# EAGLE board panel (EAGLE 8.2.2)
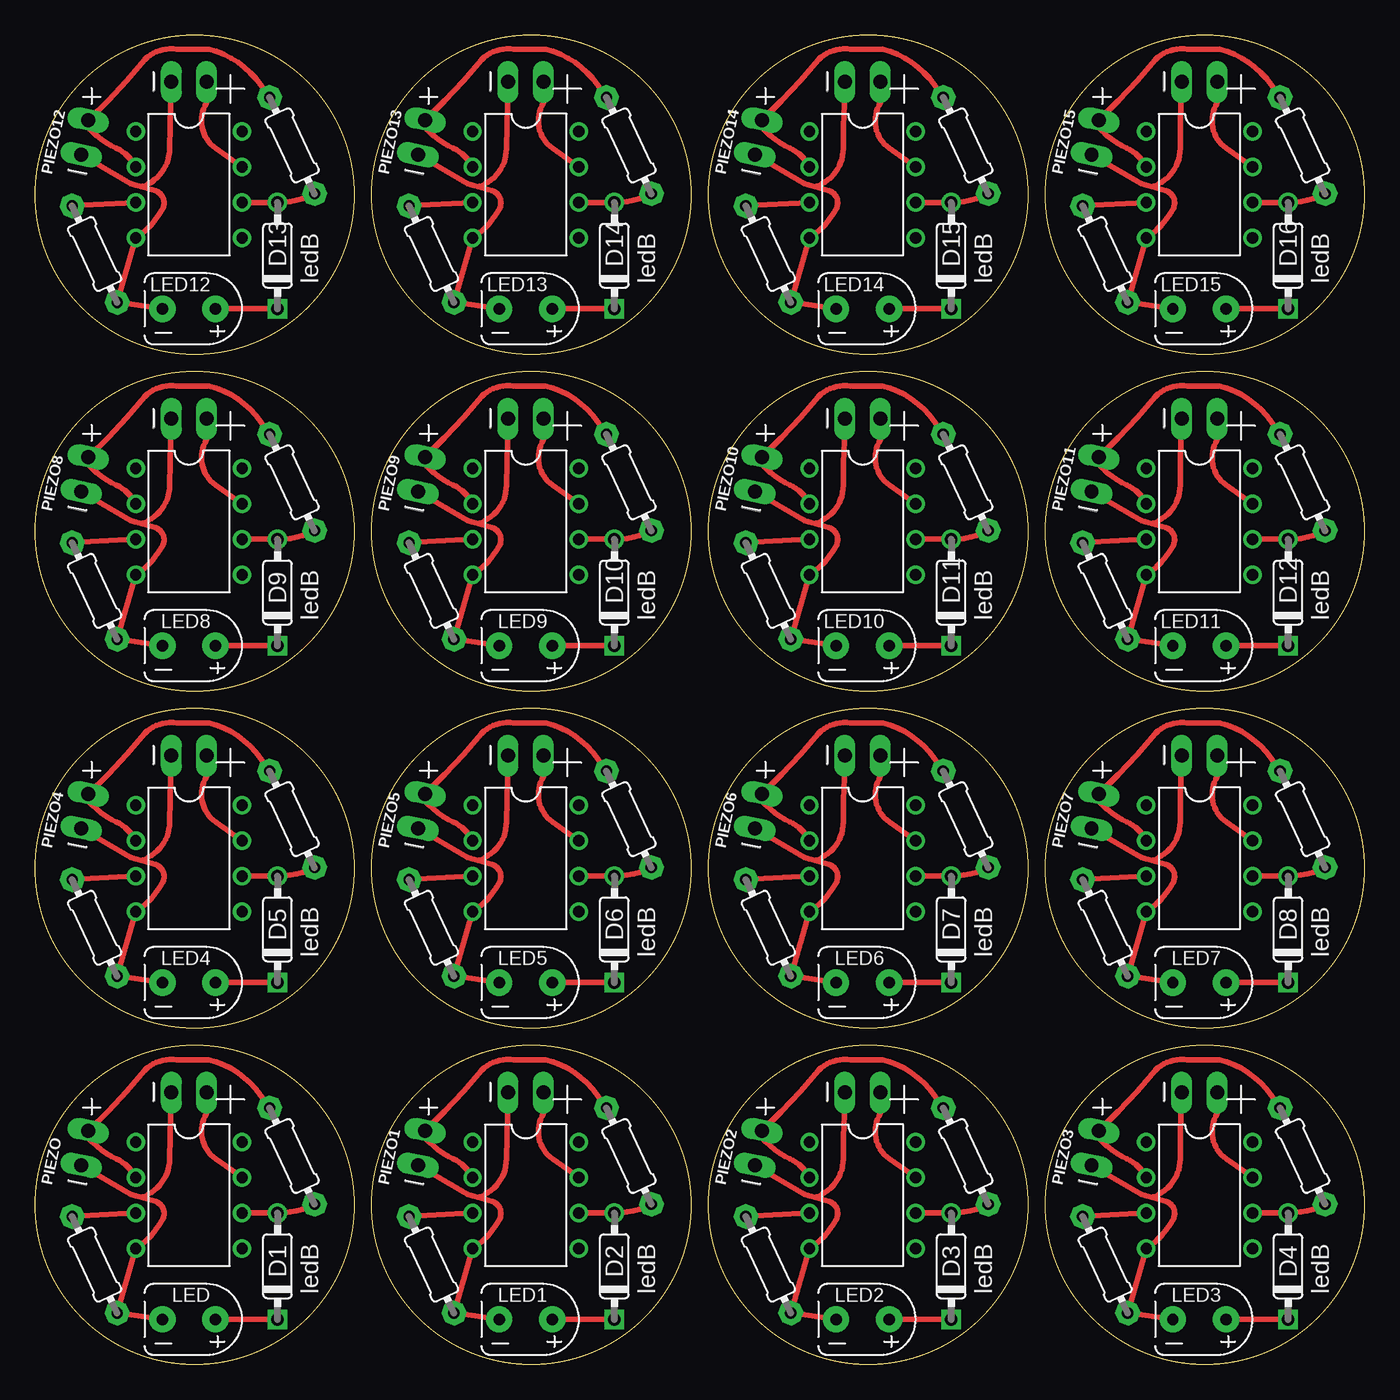
[diagram p0: board, top side]

Size 95.25 x 95.25 mm. Coordinates in mm from the lower left corner, seen from the top.
Outline: circle at 11.43,11.43 radius 11.43
Outline: circle at 35.56,11.43 radius 11.43
Outline: circle at 59.69,11.43 radius 11.43
Outline: circle at 83.82,11.43 radius 11.43
Outline: circle at 11.43,35.56 radius 11.43
Outline: circle at 35.56,35.56 radius 11.43
Outline: circle at 59.69,35.56 radius 11.43
Outline: circle at 83.82,35.56 radius 11.43
Outline: circle at 11.43,59.69 radius 11.43
Outline: circle at 35.56,59.69 radius 11.43
Outline: circle at 59.69,59.69 radius 11.43
Outline: circle at 83.82,59.69 radius 11.43
Outline: circle at 11.43,83.82 radius 11.43
Outline: circle at 35.56,83.82 radius 11.43
Outline: circle at 59.69,83.82 radius 11.43
Outline: circle at 83.82,83.82 radius 11.43
Copper layers (1*16): Top 0.035mm / dielectric 1.5mm / Bottom 0.035mm
Design rules "default": minimum track width 6mil, minimum drill 0.35mm, track to track 6mil, track to pad 6mil, pad to pad 6mil, via to via 6mil, smd to smd 6mil, copper to edge 40mil, drill to drill 6mil, minimum pad ring 10mil, minimum via ring 8mil, stop-mask expansion 4mil, vias tented up to drill 0mil, thermal gap 10mil

## Footprints (pad centres in the part's own frame; a part is rotated, then mirrored left to right if it is on the bottom)
DO35-3 = drill 0.9: A 3.81,0 | drill 0.9 square: C -3.81,0
1X02_OVAL = drill 1 long: 1 -1.27,0; 2 1.27,0
LED5MM = drill 0.813 pad 1.88: A -1.905,0; K 1.905,0
DIL08 = drill 0.813 pad 1.27: 1 -3.81,-3.81; 2 -1.27,-3.81; 3 1.27,-3.81; 4 3.81,-3.81; 5 3.81,3.81; 6 1.27,3.81; 7 -1.27,3.81; 8 -3.81,3.81
1X02_PEIZO = drill 1 long: 1 -1.27,0; 2 1.27,0
0204/7 = drill 0.813 pad 1.676 octagon: 1 -3.81,0; 2 3.81,0

## Placement (x,y rotation side)
D1  diode  [DO35-3]  17.38,7.05 90 top
D2  diode  [DO35-3]  41.51,7.05 90 top
D3  diode  [DO35-3]  65.64,7.05 90 top
D4  diode  [DO35-3]  89.77,7.05 90 top
D5  diode  [DO35-3]  17.38,31.18 90 top
D6  diode  [DO35-3]  41.51,31.18 90 top
D7  diode  [DO35-3]  65.64,31.18 90 top
D8  diode  [DO35-3]  89.77,31.18 90 top
D9  diode  [DO35-3]  17.38,55.31 90 top
D10  diode  [DO35-3]  41.51,55.31 90 top
D11  diode  [DO35-3]  65.64,55.31 90 top
D12  diode  [DO35-3]  89.77,55.31 90 top
D13  diode  [DO35-3]  17.38,79.44 90 top
D14  diode  [DO35-3]  41.51,79.44 90 top
D15  diode  [DO35-3]  65.64,79.44 90 top
D16  diode  [DO35-3]  89.77,79.44 90 top
JP1  6V+  [1X02_OVAL]  11.03,19.49 0 top
JP2  6V+  [1X02_OVAL]  35.16,19.49 0 top
JP3  6V+  [1X02_OVAL]  59.29,19.49 0 top
JP4  6V+  [1X02_OVAL]  83.42,19.49 0 top
JP5  6V+  [1X02_OVAL]  11.03,43.62 0 top
JP6  6V+  [1X02_OVAL]  35.16,43.62 0 top
JP7  6V+  [1X02_OVAL]  59.29,43.62 0 top
JP8  6V+  [1X02_OVAL]  83.42,43.62 0 top
JP9  6V+  [1X02_OVAL]  11.03,67.75 0 top
JP10  6V+  [1X02_OVAL]  35.16,67.75 0 top
JP11  6V+  [1X02_OVAL]  59.29,67.75 0 top
JP12  6V+  [1X02_OVAL]  83.42,67.75 0 top
JP13  6V+  [1X02_OVAL]  11.03,91.88 0 top
JP14  6V+  [1X02_OVAL]  35.16,91.88 0 top
JP15  6V+  [1X02_OVAL]  59.29,91.88 0 top
JP16  6V+  [1X02_OVAL]  83.42,91.88 0 top
LED  [LED5MM]  11.03,3.24 180 top
LED1  [LED5MM]  35.16,3.24 180 top
LED2  [LED5MM]  59.29,3.24 180 top
LED3  [LED5MM]  83.42,3.24 180 top
LED4  [LED5MM]  11.03,27.37 180 top
LED5  [LED5MM]  35.16,27.37 180 top
LED6  [LED5MM]  59.29,27.37 180 top
LED7  [LED5MM]  83.42,27.37 180 top
LED8  [LED5MM]  11.03,51.5 180 top
LED9  [LED5MM]  35.16,51.5 180 top
LED10  [LED5MM]  59.29,51.5 180 top
LED11  [LED5MM]  83.42,51.5 180 top
LED12  [LED5MM]  11.03,75.63 180 top
LED13  [LED5MM]  35.16,75.63 180 top
LED14  [LED5MM]  59.29,75.63 180 top
LED15  [LED5MM]  83.42,75.63 180 top
OPAMP  LM741  [DIL08]  11.03,12.13 270 top
OPAMP1  LM741  [DIL08]  35.16,12.13 270 top
OPAMP2  LM741  [DIL08]  59.29,12.13 270 top
OPAMP3  LM741  [DIL08]  83.42,12.13 270 top
OPAMP4  LM741  [DIL08]  11.03,36.26 270 top
OPAMP5  LM741  [DIL08]  35.16,36.26 270 top
OPAMP6  LM741  [DIL08]  59.29,36.26 270 top
OPAMP7  LM741  [DIL08]  83.42,36.26 270 top
OPAMP8  LM741  [DIL08]  11.03,60.39 270 top
OPAMP9  LM741  [DIL08]  35.16,60.39 270 top
OPAMP10  LM741  [DIL08]  59.29,60.39 270 top
OPAMP11  LM741  [DIL08]  83.42,60.39 270 top
OPAMP12  LM741  [DIL08]  11.03,84.52 270 top
OPAMP13  LM741  [DIL08]  35.16,84.52 270 top
OPAMP14  LM741  [DIL08]  59.29,84.52 270 top
OPAMP15  LM741  [DIL08]  83.42,84.52 270 top
PIEZO  PIEZO  [1X02_PEIZO]  3.57,15.51 78 top
PIEZO1  PIEZO  [1X02_PEIZO]  27.7,15.51 78 top
PIEZO2  PIEZO  [1X02_PEIZO]  51.83,15.51 78 top
PIEZO3  PIEZO  [1X02_PEIZO]  75.96,15.51 78 top
PIEZO4  PIEZO  [1X02_PEIZO]  3.57,39.64 78 top
PIEZO5  PIEZO  [1X02_PEIZO]  27.7,39.64 78 top
PIEZO6  PIEZO  [1X02_PEIZO]  51.83,39.64 78 top
PIEZO7  PIEZO  [1X02_PEIZO]  75.96,39.64 78 top
PIEZO8  PIEZO  [1X02_PEIZO]  3.57,63.77 78 top
PIEZO9  PIEZO  [1X02_PEIZO]  27.7,63.77 78 top
PIEZO10  PIEZO  [1X02_PEIZO]  51.83,63.77 78 top
PIEZO11  PIEZO  [1X02_PEIZO]  75.96,63.77 78 top
PIEZO12  PIEZO  [1X02_PEIZO]  3.57,87.9 78 top
PIEZO13  PIEZO  [1X02_PEIZO]  27.7,87.9 78 top
PIEZO14  PIEZO  [1X02_PEIZO]  51.83,87.9 78 top
PIEZO15  PIEZO  [1X02_PEIZO]  75.96,87.9 78 top
R1  10K  [0204/7]  4.28,7.16 115 top
R2  10M  [0204/7]  18.42,14.93 115 top
R3  10K  [0204/7]  28.41,7.16 115 top
R4  10M  [0204/7]  42.55,14.93 115 top
R5  10K  [0204/7]  52.54,7.16 115 top
R6  10M  [0204/7]  66.68,14.93 115 top
R7  10K  [0204/7]  76.67,7.16 115 top
R8  10M  [0204/7]  90.81,14.93 115 top
R9  10K  [0204/7]  4.28,31.29 115 top
R10  10M  [0204/7]  18.42,39.06 115 top
R11  10K  [0204/7]  28.41,31.29 115 top
R12  10M  [0204/7]  42.55,39.06 115 top
R13  10K  [0204/7]  52.54,31.29 115 top
R14  10M  [0204/7]  66.68,39.06 115 top
R15  10K  [0204/7]  76.67,31.29 115 top
R16  10M  [0204/7]  90.81,39.06 115 top
R17  10K  [0204/7]  4.28,55.42 115 top
R18  10M  [0204/7]  18.42,63.19 115 top
R19  10K  [0204/7]  28.41,55.42 115 top
R20  10M  [0204/7]  42.55,63.19 115 top
R21  10K  [0204/7]  52.54,55.42 115 top
R22  10M  [0204/7]  66.68,63.19 115 top
R23  10K  [0204/7]  76.67,55.42 115 top
R24  10M  [0204/7]  90.81,63.19 115 top
R25  10K  [0204/7]  4.28,79.55 115 top
R26  10M  [0204/7]  18.42,87.32 115 top
R27  10K  [0204/7]  28.41,79.55 115 top
R28  10M  [0204/7]  42.55,87.32 115 top
R29  10K  [0204/7]  52.54,79.55 115 top
R30  10M  [0204/7]  66.68,87.32 115 top
R31  10K  [0204/7]  76.67,79.55 115 top
R32  10M  [0204/7]  90.81,87.32 115 top

## Library data of the parts
D1-D16 JP1-JP16 LED LED1-LED15 OPAMP OPAMP1-OPAMP15 PIEZO PIEZO1-PIEZO15 R1-R32 = ledB_sch

## Nets
GND: JP1.1 LED.K OPAMP.4 PIEZO.1 R1.1
GND1: JP2.1 LED1.K OPAMP1.4 PIEZO1.1 R3.1
GND2: JP3.1 LED2.K OPAMP2.4 PIEZO2.1 R5.1
GND3: JP4.1 LED3.K OPAMP3.4 PIEZO3.1 R7.1
GND4: JP5.1 LED4.K OPAMP4.4 PIEZO4.1 R9.1
GND5: JP6.1 LED5.K OPAMP5.4 PIEZO5.1 R11.1
GND6: JP7.1 LED6.K OPAMP6.4 PIEZO6.1 R13.1
GND7: JP8.1 LED7.K OPAMP7.4 PIEZO7.1 R15.1
GND8: JP9.1 LED8.K OPAMP8.4 PIEZO8.1 R17.1
GND9: JP10.1 LED9.K OPAMP9.4 PIEZO9.1 R19.1
GND10: JP11.1 LED10.K OPAMP10.4 PIEZO10.1 R21.1
GND11: JP12.1 LED11.K OPAMP11.4 PIEZO11.1 R23.1
GND12: JP13.1 LED12.K OPAMP12.4 PIEZO12.1 R25.1
GND13: JP14.1 LED13.K OPAMP13.4 PIEZO13.1 R27.1
GND14: JP15.1 LED14.K OPAMP14.4 PIEZO14.1 R29.1
GND15: JP16.1 LED15.K OPAMP15.4 PIEZO15.1 R31.1
N$1: OPAMP.3 R1.2
N$2: D1.A OPAMP.6 R2.1
N$3: D2.A OPAMP1.6 R4.1
N$4: D2.C LED1.A
N$5: D1.C LED.A
N$6: OPAMP1.3 R3.2
N$7: D3.A OPAMP2.6 R6.1
N$8: D3.C LED2.A
N$9: OPAMP2.3 R5.2
N$10: D4.A OPAMP3.6 R8.1
N$11: D4.C LED3.A
N$12: OPAMP3.3 R7.2
N$13: D5.A OPAMP4.6 R10.1
N$14: D5.C LED4.A
N$15: OPAMP4.3 R9.2
N$16: D6.A OPAMP5.6 R12.1
N$17: D6.C LED5.A
N$18: OPAMP5.3 R11.2
N$19: D7.A OPAMP6.6 R14.1
N$20: D7.C LED6.A
N$21: OPAMP6.3 R13.2
N$22: D8.A OPAMP7.6 R16.1
N$23: D8.C LED7.A
N$24: OPAMP7.3 R15.2
N$25: D9.A OPAMP8.6 R18.1
N$26: D9.C LED8.A
N$27: OPAMP8.3 R17.2
N$28: D10.A OPAMP9.6 R20.1
N$29: D10.C LED9.A
N$30: OPAMP9.3 R19.2
N$31: D11.A OPAMP10.6 R22.1
N$32: D11.C LED10.A
N$33: OPAMP10.3 R21.2
N$34: D12.A OPAMP11.6 R24.1
N$35: D12.C LED11.A
N$36: OPAMP11.3 R23.2
N$37: D13.A OPAMP12.6 R26.1
N$38: D13.C LED12.A
N$39: OPAMP12.3 R25.2
N$40: D14.A OPAMP13.6 R28.1
N$41: D14.C LED13.A
N$42: OPAMP13.3 R27.2
N$43: D15.A OPAMP14.6 R30.1
N$44: D15.C LED14.A
N$45: OPAMP14.3 R29.2
N$46: D16.A OPAMP15.6 R32.1
N$47: D16.C LED15.A
N$48: OPAMP15.3 R31.2
SIG: OPAMP.2 PIEZO.2 R2.2
SIG1: OPAMP1.2 PIEZO1.2 R4.2
SIG2: OPAMP2.2 PIEZO2.2 R6.2
SIG3: OPAMP3.2 PIEZO3.2 R8.2
SIG4: OPAMP4.2 PIEZO4.2 R10.2
SIG5: OPAMP5.2 PIEZO5.2 R12.2
SIG6: OPAMP6.2 PIEZO6.2 R14.2
SIG7: OPAMP7.2 PIEZO7.2 R16.2
SIG8: OPAMP8.2 PIEZO8.2 R18.2
SIG9: OPAMP9.2 PIEZO9.2 R20.2
SIG10: OPAMP10.2 PIEZO10.2 R22.2
SIG11: OPAMP11.2 PIEZO11.2 R24.2
SIG12: OPAMP12.2 PIEZO12.2 R26.2
SIG13: OPAMP13.2 PIEZO13.2 R28.2
SIG14: OPAMP14.2 PIEZO14.2 R30.2
SIG15: OPAMP15.2 PIEZO15.2 R32.2
VCC: JP1.2 OPAMP.7
VCC1: JP2.2 OPAMP1.7
VCC2: JP3.2 OPAMP2.7
VCC3: JP4.2 OPAMP3.7
VCC4: JP5.2 OPAMP4.7
VCC5: JP6.2 OPAMP5.7
VCC6: JP7.2 OPAMP6.7
VCC7: JP8.2 OPAMP7.7
VCC8: JP9.2 OPAMP8.7
VCC9: JP10.2 OPAMP9.7
VCC10: JP11.2 OPAMP10.7
VCC11: JP12.2 OPAMP11.7
VCC12: JP13.2 OPAMP12.7
VCC13: JP14.2 OPAMP13.7
VCC14: JP15.2 OPAMP14.7
VCC15: JP16.2 OPAMP15.7

## Tracks (layer width: path | path; a pad name or v marks a point on that pad's centre or on a via)
GND
  Top 0.305: 6.86,12.19 arc57 8.13,12.19
  Top 0.406: PIEZO.1 6.86,12.19 8.64,11.68 arc-100 9.14,10.41 arc-29 OPAMP.4 R1.1 LED.K | 8.13,12.19 arc61 9.65,14.73 arc-1 JP1.1
GND1
  Top 0.305: 30.99,12.19 arc57 32.26,12.19
  Top 0.406: PIEZO1.1 30.99,12.19 32.77,11.68 arc-100 33.27,10.41 arc-29 OPAMP1.4 R3.1 LED1.K | 32.26,12.19 arc61 33.78,14.73 arc-1 JP2.1
GND2
  Top 0.305: 55.12,12.19 arc57 56.39,12.19
  Top 0.406: PIEZO2.1 55.12,12.19 56.9,11.68 arc-100 57.4,10.41 arc-29 OPAMP2.4 R5.1 LED2.K | 56.39,12.19 arc61 57.91,14.73 arc-1 JP3.1
GND3
  Top 0.305: 79.25,12.19 arc57 80.52,12.19
  Top 0.406: PIEZO3.1 79.25,12.19 81.03,11.68 arc-100 81.53,10.41 arc-29 OPAMP3.4 R7.1 LED3.K | 80.52,12.19 arc61 82.04,14.73 arc-1 JP4.1
GND4
  Top 0.305: 6.86,36.32 arc57 8.13,36.32
  Top 0.406: PIEZO4.1 6.86,36.32 8.64,35.81 arc-100 9.14,34.54 arc-29 OPAMP4.4 R9.1 LED4.K | 8.13,36.32 arc61 9.65,38.86 arc-1 JP5.1
GND5
  Top 0.305: 30.99,36.32 arc57 32.26,36.32
  Top 0.406: PIEZO5.1 30.99,36.32 32.77,35.81 arc-100 33.27,34.54 arc-29 OPAMP5.4 R11.1 LED5.K | 32.26,36.32 arc61 33.78,38.86 arc-1 JP6.1
GND6
  Top 0.305: 55.12,36.32 arc57 56.39,36.32
  Top 0.406: PIEZO6.1 55.12,36.32 56.9,35.81 arc-100 57.4,34.54 arc-29 OPAMP6.4 R13.1 LED6.K | 56.39,36.32 arc61 57.91,38.86 arc-1 JP7.1
GND7
  Top 0.305: 79.25,36.32 arc57 80.52,36.32
  Top 0.406: PIEZO7.1 79.25,36.32 81.03,35.81 arc-100 81.53,34.54 arc-29 OPAMP7.4 R15.1 LED7.K | 80.52,36.32 arc61 82.04,38.86 arc-1 JP8.1
GND8
  Top 0.305: 6.86,60.45 arc57 8.13,60.45
  Top 0.406: PIEZO8.1 6.86,60.45 8.64,59.94 arc-100 9.14,58.67 arc-29 OPAMP8.4 R17.1 LED8.K | 8.13,60.45 arc61 9.65,62.99 arc-1 JP9.1
GND9
  Top 0.305: 30.99,60.45 arc57 32.26,60.45
  Top 0.406: PIEZO9.1 30.99,60.45 32.77,59.94 arc-100 33.27,58.67 arc-29 OPAMP9.4 R19.1 LED9.K | 32.26,60.45 arc61 33.78,62.99 arc-1 JP10.1
GND10
  Top 0.305: 55.12,60.45 arc57 56.39,60.45
  Top 0.406: PIEZO10.1 55.12,60.45 56.9,59.94 arc-100 57.4,58.67 arc-29 OPAMP10.4 R21.1 LED10.K | 56.39,60.45 arc61 57.91,62.99 arc-1 JP11.1
GND11
  Top 0.305: 79.25,60.45 arc57 80.52,60.45
  Top 0.406: PIEZO11.1 79.25,60.45 81.03,59.94 arc-100 81.53,58.67 arc-29 OPAMP11.4 R23.1 LED11.K | 80.52,60.45 arc61 82.04,62.99 arc-1 JP12.1
GND12
  Top 0.305: 6.86,84.58 arc57 8.13,84.58
  Top 0.406: PIEZO12.1 6.86,84.58 8.64,84.07 arc-100 9.14,82.8 arc-29 OPAMP12.4 R25.1 LED12.K | 8.13,84.58 arc61 9.65,87.12 arc-1 JP13.1
GND13
  Top 0.305: 30.99,84.58 arc57 32.26,84.58
  Top 0.406: PIEZO13.1 30.99,84.58 32.77,84.07 arc-100 33.27,82.8 arc-29 OPAMP13.4 R27.1 LED13.K | 32.26,84.58 arc61 33.78,87.12 arc-1 JP14.1
GND14
  Top 0.305: 55.12,84.58 arc57 56.39,84.58
  Top 0.406: PIEZO14.1 55.12,84.58 56.9,84.07 arc-100 57.4,82.8 arc-29 OPAMP14.4 R29.1 LED14.K | 56.39,84.58 arc61 57.91,87.12 arc-1 JP15.1
GND15
  Top 0.305: 79.25,84.58 arc57 80.52,84.58
  Top 0.406: PIEZO15.1 79.25,84.58 81.03,84.07 arc-100 81.53,82.8 arc-29 OPAMP15.4 R31.1 LED15.K | 80.52,84.58 arc61 82.04,87.12 arc-1 JP16.1
N$1
  Top 0.406: OPAMP.3 R1.2
N$2
  Top 0.406: OPAMP.6 D1.A arc26 R2.1
N$3
  Top 0.406: OPAMP1.6 D2.A arc26 R4.1
N$4
  Top 0.406: LED1.A D2.C
N$5
  Top 0.406: LED.A D1.C
N$6
  Top 0.406: OPAMP1.3 R3.2
N$7
  Top 0.406: OPAMP2.6 D3.A arc26 R6.1
N$8
  Top 0.406: LED2.A D3.C
N$9
  Top 0.406: OPAMP2.3 R5.2
N$10
  Top 0.406: OPAMP3.6 D4.A arc26 R8.1
N$11
  Top 0.406: LED3.A D4.C
N$12
  Top 0.406: OPAMP3.3 R7.2
N$13
  Top 0.406: OPAMP4.6 D5.A arc26 R10.1
N$14
  Top 0.406: LED4.A D5.C
N$15
  Top 0.406: OPAMP4.3 R9.2
N$16
  Top 0.406: OPAMP5.6 D6.A arc26 R12.1
N$17
  Top 0.406: LED5.A D6.C
N$18
  Top 0.406: OPAMP5.3 R11.2
N$19
  Top 0.406: OPAMP6.6 D7.A arc26 R14.1
N$20
  Top 0.406: LED6.A D7.C
N$21
  Top 0.406: OPAMP6.3 R13.2
N$22
  Top 0.406: OPAMP7.6 D8.A arc26 R16.1
N$23
  Top 0.406: LED7.A D8.C
N$24
  Top 0.406: OPAMP7.3 R15.2
N$25
  Top 0.406: OPAMP8.6 D9.A arc26 R18.1
N$26
  Top 0.406: LED8.A D9.C
N$27
  Top 0.406: OPAMP8.3 R17.2
N$28
  Top 0.406: OPAMP9.6 D10.A arc26 R20.1
N$29
  Top 0.406: LED9.A D10.C
N$30
  Top 0.406: OPAMP9.3 R19.2
N$31
  Top 0.406: OPAMP10.6 D11.A arc26 R22.1
N$32
  Top 0.406: LED10.A D11.C
N$33
  Top 0.406: OPAMP10.3 R21.2
N$34
  Top 0.406: OPAMP11.6 D12.A arc26 R24.1
N$35
  Top 0.406: LED11.A D12.C
N$36
  Top 0.406: OPAMP11.3 R23.2
N$37
  Top 0.406: OPAMP12.6 D13.A arc26 R26.1
N$38
  Top 0.406: LED12.A D13.C
N$39
  Top 0.406: OPAMP12.3 R25.2
N$40
  Top 0.406: OPAMP13.6 D14.A arc26 R28.1
N$41
  Top 0.406: LED13.A D14.C
N$42
  Top 0.406: OPAMP13.3 R27.2
N$43
  Top 0.406: OPAMP14.6 D15.A arc26 R30.1
N$44
  Top 0.406: LED14.A D15.C
N$45
  Top 0.406: OPAMP14.3 R29.2
N$46
  Top 0.406: OPAMP15.6 D16.A arc26 R32.1
N$47
  Top 0.406: LED15.A D16.C
N$48
  Top 0.406: OPAMP15.3 R31.2
SIG
  Top 0.305: R2.2 16.76,18.29 | PIEZO.2 arc87 3.81,16.26
  Top 0.406: 16.76,18.29 arc51 12.45,21.84 arc-5 10.16,21.84 arc53 7.87,21.08 arc-7 PIEZO.2 | 3.81,16.26 arc24 5.84,14.73 arc-38 OPAMP.2
SIG1
  Top 0.305: R4.2 40.89,18.29 | PIEZO1.2 arc87 27.94,16.26
  Top 0.406: 40.89,18.29 arc51 36.58,21.84 arc-5 34.29,21.84 arc53 32,21.08 arc-7 PIEZO1.2 | 27.94,16.26 arc24 29.97,14.73 arc-38 OPAMP1.2
SIG2
  Top 0.305: R6.2 65.02,18.29 | PIEZO2.2 arc87 52.07,16.26
  Top 0.406: 65.02,18.29 arc51 60.71,21.84 arc-5 58.42,21.84 arc53 56.13,21.08 arc-7 PIEZO2.2 | 52.07,16.26 arc24 54.1,14.73 arc-38 OPAMP2.2
SIG3
  Top 0.305: R8.2 89.15,18.29 | PIEZO3.2 arc87 76.2,16.26
  Top 0.406: 89.15,18.29 arc51 84.84,21.84 arc-5 82.55,21.84 arc53 80.26,21.08 arc-7 PIEZO3.2 | 76.2,16.26 arc24 78.23,14.73 arc-38 OPAMP3.2
SIG4
  Top 0.305: R10.2 16.76,42.42 | PIEZO4.2 arc87 3.81,40.39
  Top 0.406: 16.76,42.42 arc51 12.45,45.97 arc-5 10.16,45.97 arc53 7.87,45.21 arc-7 PIEZO4.2 | 3.81,40.39 arc24 5.84,38.86 arc-38 OPAMP4.2
SIG5
  Top 0.305: R12.2 40.89,42.42 | PIEZO5.2 arc87 27.94,40.39
  Top 0.406: 40.89,42.42 arc51 36.58,45.97 arc-5 34.29,45.97 arc53 32,45.21 arc-7 PIEZO5.2 | 27.94,40.39 arc24 29.97,38.86 arc-38 OPAMP5.2
SIG6
  Top 0.305: R14.2 65.02,42.42 | PIEZO6.2 arc87 52.07,40.39
  Top 0.406: 65.02,42.42 arc51 60.71,45.97 arc-5 58.42,45.97 arc53 56.13,45.21 arc-7 PIEZO6.2 | 52.07,40.39 arc24 54.1,38.86 arc-38 OPAMP6.2
SIG7
  Top 0.305: R16.2 89.15,42.42 | PIEZO7.2 arc87 76.2,40.39
  Top 0.406: 89.15,42.42 arc51 84.84,45.97 arc-5 82.55,45.97 arc53 80.26,45.21 arc-7 PIEZO7.2 | 76.2,40.39 arc24 78.23,38.86 arc-38 OPAMP7.2
SIG8
  Top 0.305: R18.2 16.76,66.55 | PIEZO8.2 arc87 3.81,64.52
  Top 0.406: 16.76,66.55 arc51 12.45,70.1 arc-5 10.16,70.1 arc53 7.87,69.34 arc-7 PIEZO8.2 | 3.81,64.52 arc24 5.84,62.99 arc-38 OPAMP8.2
SIG9
  Top 0.305: R20.2 40.89,66.55 | PIEZO9.2 arc87 27.94,64.52
  Top 0.406: 40.89,66.55 arc51 36.58,70.1 arc-5 34.29,70.1 arc53 32,69.34 arc-7 PIEZO9.2 | 27.94,64.52 arc24 29.97,62.99 arc-38 OPAMP9.2
SIG10
  Top 0.305: R22.2 65.02,66.55 | PIEZO10.2 arc87 52.07,64.52
  Top 0.406: 65.02,66.55 arc51 60.71,70.1 arc-5 58.42,70.1 arc53 56.13,69.34 arc-7 PIEZO10.2 | 52.07,64.52 arc24 54.1,62.99 arc-38 OPAMP10.2
SIG11
  Top 0.305: R24.2 89.15,66.55 | PIEZO11.2 arc87 76.2,64.52
  Top 0.406: 89.15,66.55 arc51 84.84,70.1 arc-5 82.55,70.1 arc53 80.26,69.34 arc-7 PIEZO11.2 | 76.2,64.52 arc24 78.23,62.99 arc-38 OPAMP11.2
SIG12
  Top 0.305: R26.2 16.76,90.68 | PIEZO12.2 arc87 3.81,88.65
  Top 0.406: 16.76,90.68 arc51 12.45,94.23 arc-5 10.16,94.23 arc53 7.87,93.47 arc-7 PIEZO12.2 | 3.81,88.65 arc24 5.84,87.12 arc-38 OPAMP12.2
SIG13
  Top 0.305: R28.2 40.89,90.68 | PIEZO13.2 arc87 27.94,88.65
  Top 0.406: 40.89,90.68 arc51 36.58,94.23 arc-5 34.29,94.23 arc53 32,93.47 arc-7 PIEZO13.2 | 27.94,88.65 arc24 29.97,87.12 arc-38 OPAMP13.2
SIG14
  Top 0.305: R30.2 65.02,90.68 | PIEZO14.2 arc87 52.07,88.65
  Top 0.406: 65.02,90.68 arc51 60.71,94.23 arc-5 58.42,94.23 arc53 56.13,93.47 arc-7 PIEZO14.2 | 52.07,88.65 arc24 54.1,87.12 arc-38 OPAMP14.2
SIG15
  Top 0.305: R32.2 89.15,90.68 | PIEZO15.2 arc87 76.2,88.65
  Top 0.406: 89.15,90.68 arc51 84.84,94.23 arc-5 82.55,94.23 arc53 80.26,93.47 arc-7 PIEZO15.2 | 76.2,88.65 arc24 78.23,87.12 arc-38 OPAMP15.2
VCC
  Top 0.406: OPAMP.7 12.95,14.73 arc-81 12.19,17.78 arc47 JP1.2
VCC1
  Top 0.406: OPAMP1.7 37.08,14.73 arc-81 36.32,17.78 arc47 JP2.2
VCC2
  Top 0.406: OPAMP2.7 61.21,14.73 arc-81 60.45,17.78 arc47 JP3.2
VCC3
  Top 0.406: OPAMP3.7 85.34,14.73 arc-81 84.58,17.78 arc47 JP4.2
VCC4
  Top 0.406: OPAMP4.7 12.95,38.86 arc-81 12.19,41.91 arc47 JP5.2
VCC5
  Top 0.406: OPAMP5.7 37.08,38.86 arc-81 36.32,41.91 arc47 JP6.2
VCC6
  Top 0.406: OPAMP6.7 61.21,38.86 arc-81 60.45,41.91 arc47 JP7.2
VCC7
  Top 0.406: OPAMP7.7 85.34,38.86 arc-81 84.58,41.91 arc47 JP8.2
VCC8
  Top 0.406: OPAMP8.7 12.95,62.99 arc-81 12.19,66.04 arc47 JP9.2
VCC9
  Top 0.406: OPAMP9.7 37.08,62.99 arc-81 36.32,66.04 arc47 JP10.2
VCC10
  Top 0.406: OPAMP10.7 61.21,62.99 arc-81 60.45,66.04 arc47 JP11.2
VCC11
  Top 0.406: OPAMP11.7 85.34,62.99 arc-81 84.58,66.04 arc47 JP12.2
VCC12
  Top 0.406: OPAMP12.7 12.95,87.12 arc-81 12.19,90.17 arc47 JP13.2
VCC13
  Top 0.406: OPAMP13.7 37.08,87.12 arc-81 36.32,90.17 arc47 JP14.2
VCC14
  Top 0.406: OPAMP14.7 61.21,87.12 arc-81 60.45,90.17 arc47 JP15.2
VCC15
  Top 0.406: OPAMP15.7 85.34,87.12 arc-81 84.58,90.17 arc47 JP16.2

## Text on the board
tPlace: ledB | ledB | ledB | ledB | ledB | ledB | ledB | ledB | ledB | ledB | ledB | ledB | ledB | ledB | ledB | ledB